# EAGLE board Brake (EAGLE 5.10)
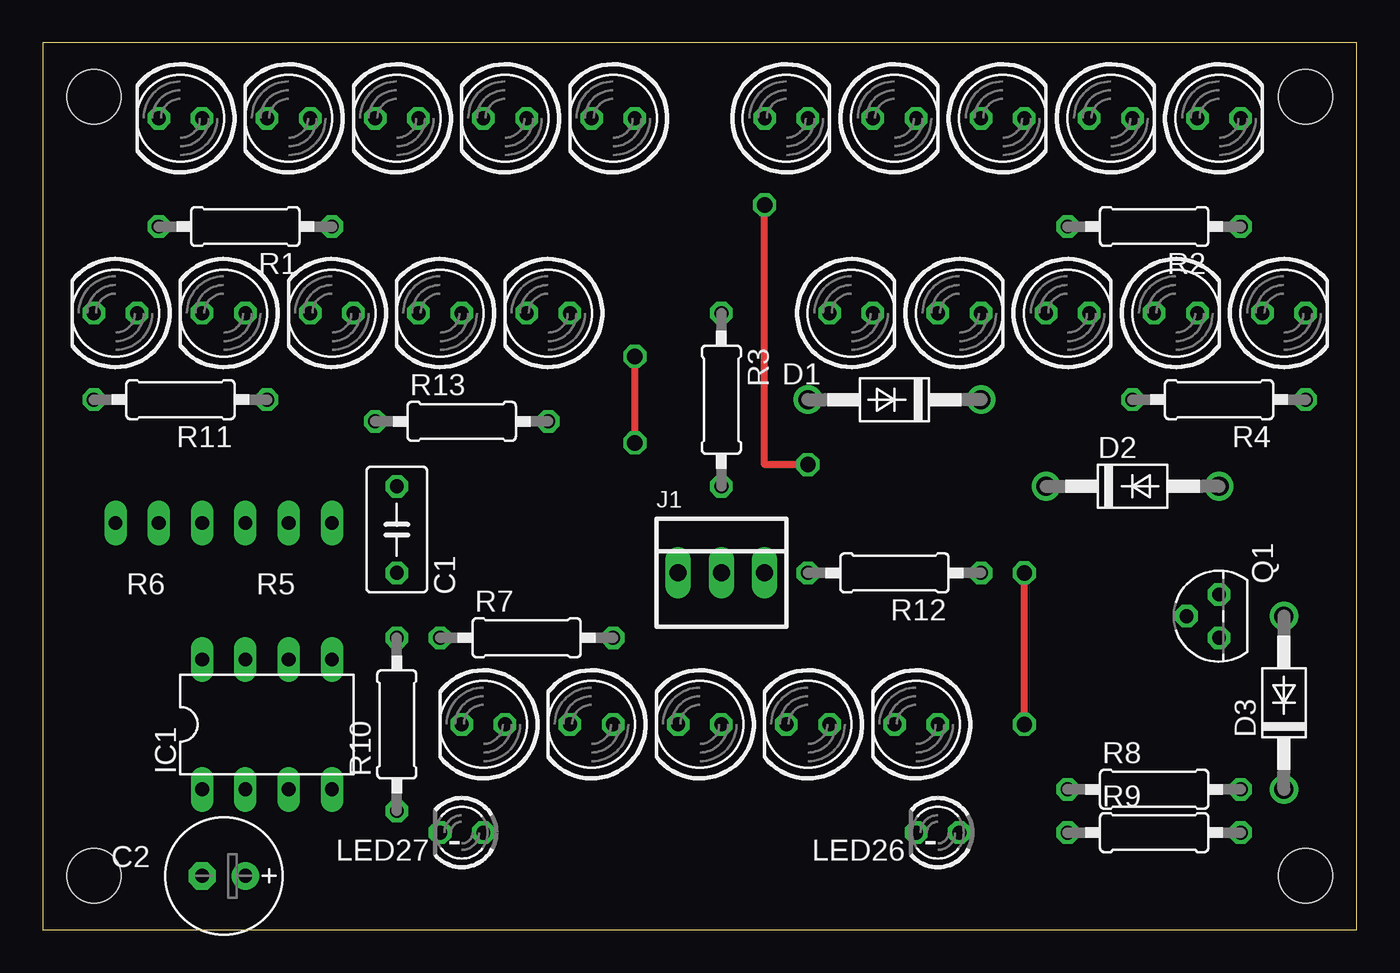
[diagram p0: board, top side]
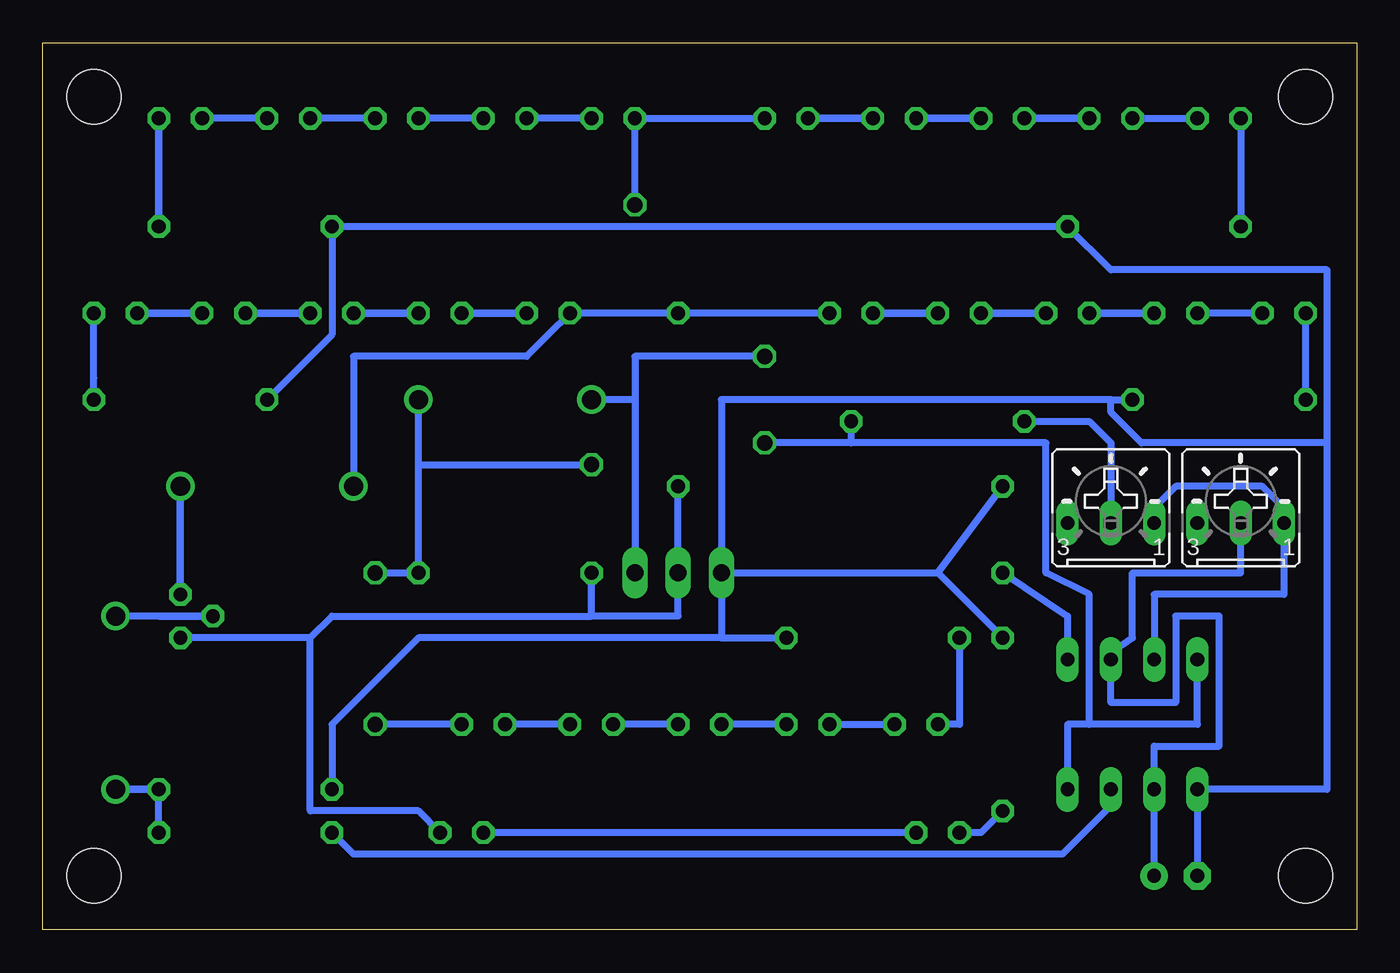
[diagram p1: board, bottom side, seen from below]

Size 77.14 x 52.06 mm. Coordinates in mm from the lower left corner, seen from the top.
Outline: 0,0 77.14,0 77.14,52.06 0,52.06 0,0
Copper layers (1*16): Top 0.035mm / dielectric 1.5mm / Bottom 0.035mm
Design rules "default": minimum track width 10mil, minimum drill 24mil, track to track 8mil, track to pad 8mil, pad to pad 8mil, via to via 8mil, smd to smd 8mil, copper to edge 40mil, drill to drill 8mil, minimum pad ring 10mil, minimum via ring 8mil, stop-mask expansion 4mil, vias tented up to drill 0mil, thermal gap 10mil
Holes 3.17 mm at 3.01,48.89 3.01,3.17 74.13,3.17 74.13,48.89

## Footprints (pad centres in the part's own frame; a part is rotated, then mirrored left to right if it is on the bottom)
C050-035X075 = drill 0.813 octagon: 1 -2.54,0; 2 2.54,0
E2,5-7 = drill 0.813 pad 1.6 round: + -1.27,0 | drill 0.813 pad 1.6 octagon: - 1.27,0
DO41-10 = drill 1.118 round: A 5.08,0; C -5.08,0
DIL-08 = drill 0.813 long: 1 -3.81,-3.81; 2 -1.27,-3.81; 3 1.27,-3.81; 4 3.81,-3.81; 5 3.81,3.81; 6 1.27,3.81; 7 -1.27,3.81; 8 -3.81,3.81
22-23-2031 = drill 1 long: 1 -2.54,0; 2 0,0; 3 2.54,0
LED5MM = drill 0.813 octagon: A -1.27,0; K 1.27,0
LED3MM = drill 0.813 octagon: A -1.27,0; K 1.27,0
TO92 = drill 0.813 octagon: 1 1.27,0; 2 0,1.905; 3 -1.27,0
0207/10 = drill 0.813 octagon: 1 -5.08,0; 2 5.08,0
B25U = drill 0.813 long: A 2.54,-0.889; E -2.54,-0.889; S 0,-0.889

## Placement (x,y rotation side)
C1  0.1u  [C050-035X075]  20.79,23.49 270 top
C2  100u  [E2,5-7]  10.63,3.17 180 top
D1  1N4004  [DO41-10]  50,31.11 180 top
D2  1N4004  [DO41-10]  63.97,26.03 0 top
D3  1N4004  [DO41-10]  72.86,13.33 90 top
IC1  NE555  [DIL-08]  13.17,12.06 0 top
J1  22-23-2031  [22-23-2031]  39.84,20.95 0 top
LED1  red  [LED5MM]  8.09,47.62 180 top
LED2  red  [LED5MM]  14.44,47.62 180 top
LED3  red  [LED5MM]  20.79,47.62 180 top
LED4  red  [LED5MM]  27.14,47.62 180 top
LED5  red  [LED5MM]  33.49,47.62 180 top
LED6  red  [LED5MM]  43.65,47.62 0 top
LED7  red  [LED5MM]  50,47.62 0 top
LED8  red  [LED5MM]  56.35,47.62 0 top
LED9  red  [LED5MM]  62.7,47.62 0 top
LED10  red  [LED5MM]  69.05,47.62 0 top
LED11  red  [LED5MM]  4.28,36.19 180 top
LED12  red  [LED5MM]  10.63,36.19 180 top
LED13  red  [LED5MM]  16.98,36.19 180 top
LED14  red  [LED5MM]  23.33,36.19 180 top
LED15  red  [LED5MM]  29.68,36.19 180 top
LED16  red  [LED5MM]  47.46,36.19 0 top
LED17  red  [LED5MM]  53.81,36.19 0 top
LED18  red  [LED5MM]  60.16,36.19 0 top
LED19  red  [LED5MM]  66.51,36.19 0 top
LED20  red  [LED5MM]  72.86,36.19 0 top
LED21  red  [LED5MM]  25.87,12.06 180 top
LED22  red  [LED5MM]  32.22,12.06 180 top
LED23  red  [LED5MM]  38.57,12.06 180 top
LED24  red  [LED5MM]  44.92,12.06 180 top
LED25  red  [LED5MM]  51.27,12.06 180 top
LED26  white  [LED3MM]  52.54,5.71 180 top
LED27  white  [LED3MM]  24.6,5.71 180 top
Q1  2N3906  [TO92]  69.05,18.41 90 top
R1  39  [0207/10]  11.9,41.27 180 top
R2  39  [0207/10]  65.24,41.27 180 top
R3  330  [0207/10]  39.84,31.11 270 top
R4  39  [0207/10]  69.05,31.11 180 top
R5  10k  [B25U]  14.44,24.76 0 bottom
R6  10k  [B25U]  6.82,24.76 0 bottom
R7  39  [0207/10]  28.41,17.14 0 top
R8  47k  [0207/10]  65.24,8.25 0 top
R9  1k  [0207/10]  65.24,5.71 0 top
R10  100  [0207/10]  20.79,12.06 90 top
R11  39  [0207/10]  8.09,31.11 180 top
R12  330  [0207/10]  50,20.95 180 top
R13  1k  [0207/10]  24.6,29.84 0 top

## Library data of the parts
C1 C2 R1-R4 R7-R13 = rcl
D1-D3 = diode
IC1 = st-microelectronics
J1 = con-molex
LED1-LED27 = led
Q1 = transistor-pnp
R5 R6 = pot

## Nets
GND: C1.1 C2.- IC1.1 J1.1 R1.1 R2.2 R4.2 R7.2 R8.1 R10.2 R11.1
N$1: LED1.A LED2.K
N$2: LED2.A LED3.K
N$3: LED3.A LED4.K
N$4: LED4.A LED5.K
N$5: LED6.K LED7.A
N$6: LED7.K LED8.A
N$7: LED8.K LED9.A
N$8: LED9.K LED10.A
N$9: LED11.A LED12.K
N$10: LED12.A LED13.K
N$11: LED13.A LED14.K
N$12: LED14.A LED15.K
N$13: LED16.K LED17.A
N$14: LED17.K LED18.A
N$15: LED18.K LED19.A
N$16: LED19.K LED20.A
N$17: LED21.A LED22.K
N$18: LED22.A LED23.K
N$19: LED23.A LED24.K
N$20: LED24.A LED25.K
N$21: IC1.7 R5.A R6.A
N$22: IC1.3 R9.1
N$23: LED1.K R1.2
N$24: R5.S R13.1
N$25: LED11.K R11.2
N$26: LED10.K R2.1
N$27: LED20.K R4.1
N$28: LED26.K LED27.A
N$29: LED27.K R10.1
N$30: LED21.K R7.1
N$33: D3.C R8.2 R9.2
N$34: C2.+ IC1.2 IC1.6 R6.S
N$35: D3.A Q1.2
N$36: D2.A Q1.1
N$37: D1.C LED5.A LED6.A LED25.A R12.1
N$38: C1.2 IC1.5
N$39: D2.C LED15.A LED16.A R3.1
VB: D1.A IC1.4 IC1.8 J1.3 R13.2
VR: J1.2 LED26.A Q1.3 R3.2 R12.2

## Tracks (layer width: path | path; a pad name or v marks a point on that pad's centre or on a via)
GND
  Bottom 0.406: R8.1 60.16,12.06 55.08,17.14 37.3,17.14 | J1.1 37.3,17.14 | 24.6,20.95 R10.2 | J1.1 24.6,20.95 | 1.74,28.57 1.74,8.25 IC1.1 C2.- | 14.44,31.11 37.3,31.11 J1.1 | 14.44,31.11 R11.1 | 1.74,28.57 1.74,38.73 14.44,38.73 R1.1 R2.2 60.16,34.92 R4.2 | 1.74,28.57 12.64,28.57 14.44,30.37 14.44,31.11 | 24.6,20.95 C1.1 | 37.3,17.14 36.03,17.14 R7.2
N$1
  Bottom 0.406: LED2.K LED1.A
N$2
  Bottom 0.406: LED2.A LED3.K LED2.A
N$3
  Bottom 0.406: LED3.A LED4.K LED3.A
N$4
  Bottom 0.406: LED4.A LED5.K LED4.A
N$5
  Bottom 0.406: LED6.K LED7.A LED6.K
N$6
  Bottom 0.406: LED7.K LED8.A LED7.K
N$7
  Bottom 0.406: LED8.K LED9.A LED8.K
N$8
  Bottom 0.406: LED9.K LED10.A LED9.K
N$9
  Bottom 0.406: LED11.A LED12.K LED11.A
N$10
  Bottom 0.406: LED12.A LED13.K LED12.A
N$11
  Bottom 0.406: LED13.A LED14.K LED13.A
N$12
  Bottom 0.406: LED14.A LED15.K LED14.A
N$13
  Bottom 0.406: LED16.K LED17.A LED16.K
N$14
  Bottom 0.406: LED17.K LED18.A LED17.K
N$15
  Bottom 0.406: LED18.K LED19.A LED18.K
N$16
  Bottom 0.406: LED19.K LED20.A LED19.K
N$17
  Bottom 0.406: LED22.K LED21.A
N$18
  Bottom 0.406: LED22.A LED23.K
N$19
  Bottom 0.406: LED23.A LED24.K
N$20
  Bottom 0.406: LED24.A LED25.K
N$21
  Bottom 0.406: IC1.7 11.9,19.68 4.28,19.68 R6.A 4.28,24.76 5.55,26.03 10.63,26.03 11.9,24.76 R5.A
N$22
  Bottom 0.406: IC1.3 14.44,7.28 17.28,4.44 58.89,4.44 R9.1
N$23
  Bottom 0.406: LED1.K R1.2
N$24
  Bottom 0.406: R13.1 15.71,29.84 14.44,28.57 R5.S
N$25
  Bottom 0.406: R11.2 LED11.K R11.2
N$26
  Bottom 0.406: R2.1 LED10.K R2.1
N$27
  Bottom 0.406: R4.1 74.13,32.38 LED20.K
N$28
  Bottom 0.406: LED27.A LED26.K
N$29
  Bottom 0.406: R10.1 22.06,5.71 LED27.K
N$30
  Bottom 0.406: R7.1 23.33,12.06 LED21.K
N$33
  Bottom 0.406: R8.2 D3.C R8.2 | R8.2 R9.2 R8.2
N$34
  Bottom 0.406: C2.+ IC1.2 11.9,10.79 8.09,10.79 8.09,18.41 10.63,18.41 10.63,13.33 14.44,13.33 IC1.6 14.44,16.25 13.17,17.14 13.17,20.95 6.82,20.95 R6.S
N$35
  Bottom 0.406: 70.32,18.41 67.78,18.41 | Q1.2 70.32,18.41 | 70.32,18.41 D3.A
N$36
  Bottom 0.406: Q1.1 D2.A | Q1.1 D2.A | D2.A Q1.1
N$37  (via drill 0.9)
  Top 0.406: v44.92,27.3 42.38,27.3 v42.38,42.54 | v57.62,12.06 v57.62,20.95
  Bottom 0.406: LED25.A v57.62,12.06 | v57.62,20.95 R12.1 55.08,27.3 | 55.08,27.3 D1.C | LED5.A LED6.A v42.38,42.54 | 55.08,27.3 v44.92,27.3
N$38
  Bottom 0.406: C1.2 16.98,18.41 IC1.5
N$39
  Bottom 0.406: LED15.A R3.1 | D2.C 58.89,33.65 48.73,33.65 47.46,34.92 LED16.A R3.1 | LED15.A R3.1 | LED15.A R3.1
VB  (via drill 0.9)
  Top 0.406: v34.76,28.57 v34.76,33.65
  Bottom 0.406: 42.38,31.11 42.38,33.65 v34.76,33.65 | 42.38,31.11 D1.A | 42.38,31.11 J1.3 | 29.68,28.57 18.25,28.57 18.25,20.95 15.71,19.68 15.71,12.06 | 29.68,28.57 v34.76,28.57 | 15.71,12.06 9.36,12.06 IC1.8 | 15.71,12.06 16.98,12.06 IC1.4 | 29.68,28.57 R13.2
VR
  Bottom 0.406: 44.92,18.41 39.84,18.41 J1.2 R3.2 | 61.43,17.14 Q1.3 | LED26.A 55.08,6.98 61.43,6.98 61.43,17.14 | 61.43,17.14 60.16,18.41 44.92,18.41 | 44.92,18.41 R12.2

## Text on the board
tPlace: - | -
Document: Brake v4 | 2010 Nathan Plamondon